# Altium PCB source.PcbDoc
Units mm, origin at the board's own origin, x right, y up, seen from the top; angles counter-clockwise.
Board outline 92.58 x 40.77 mm, 4 copper layers (Top Layer, Layer 1, Layer 2, Bottom Layer), stack 0.603 mm thick; 74 components, 38 nets, 182 pads, 23 vias.
Unrouted connection lines stored in the file: 43.
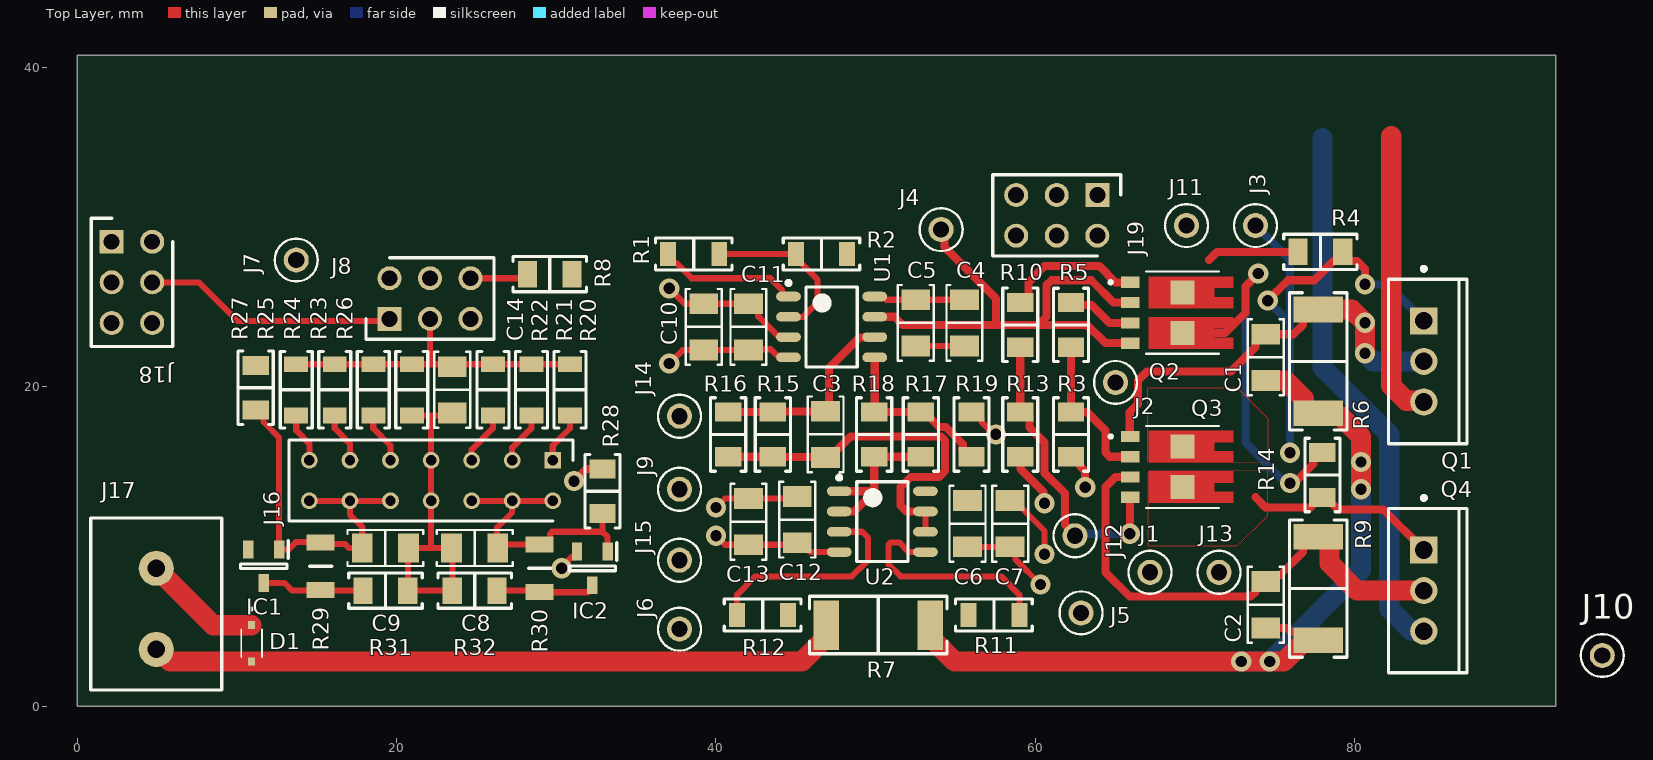
[diagram p0: Top Layer view]
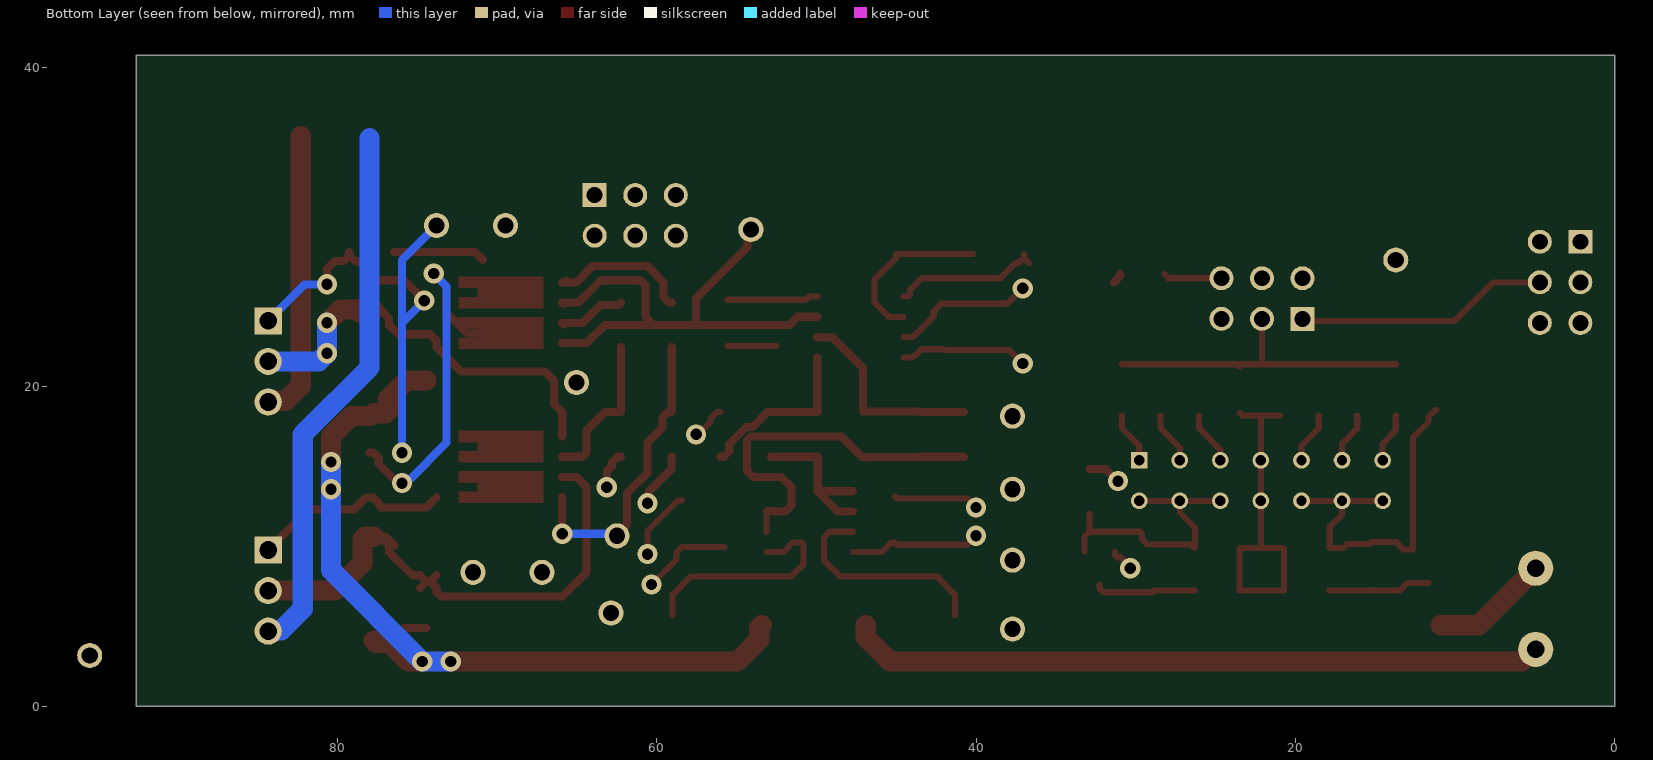
[diagram p1: Bottom Layer view, seen from below]
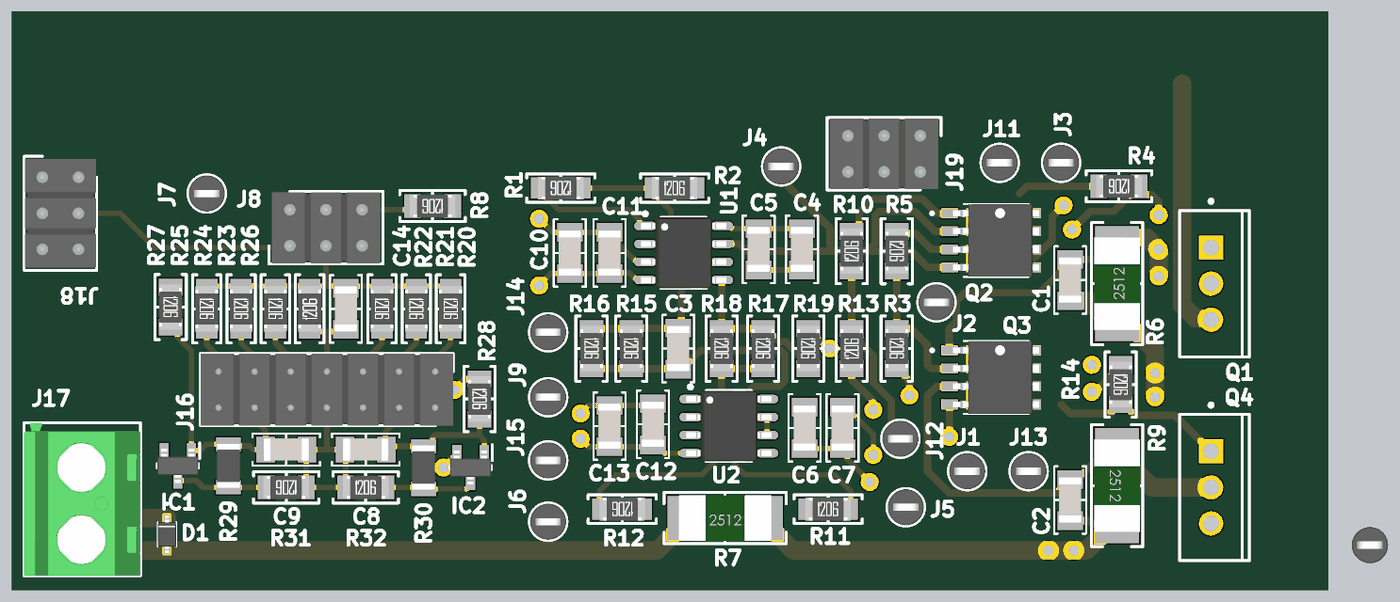
[diagram p2: 3D render of the assembled board from above, using the file's embedded part models]

## Layer stack, top to bottom
Top Solder: solder mask 0.0102, Solder Resist, Dk 3.5
Top Layer: signal copper 0.0356
Dielectric 2: prepreg 0.0711, PP-006, Dk 4.1
Layer 1: signal copper 0.035
Dielectric 1: dielectric 0.32, FR-4, Dk 4.8
Layer 2: signal copper 0.035
Dielectric 3: prepreg 0.0711, PP-006, Dk 4.1
Bottom Layer: signal copper 0.0356
Bottom Solder: solder mask 0.0102, Solder Resist, Dk 3.5

## Board outline
0,0 0,40.767 92.583,40.767 92.583,0

## Design rules (kind name [scope] priority, off if disabled: settings)
BoardOutlineClearance [All] p1: gap=0.3 ignorepadtopadclearanceinfootprint=FALSE except(0.4: Arc-SplitBarrior Arc-SplitContinuation Track-SplitBarrior Track-SplitContinuation SMDPad-SplitBarrior SMDPad-SplitContinuation THPad-SplitBarrior THPad-SplitContinuation Via-SplitBarrior Via-SplitContinuation Fill-SplitBarrior Fill-SplitContinuation Poly-SplitBarrior Poly-SplitContinuation Region-SplitBarrior Region-SplitContinuation Text-SplitBarrior Text-SplitContinuation)
Clearance "Clearance Different Nets" [All] p1: gap=0.2 ignorepadtopadclearanceinfootprint=FALSE except(0.089: Arc-Arc Arc-Track Arc-SMDPad Track-Track Track-SMDPad; 0.127: SMDPad-SMDPad SMDPad-Via THPad-Via Via-Via; 0.254: Arc-Via Arc-Text Track-Via Track-Text SMDPad-Text THPad-Text Via-Text Fill-Text Poly-Text Region-Text Text-Text; 0.5: THPad-THPad Via-Hole)
Clearance "Clearance Same Nets" [All] p2: gap=0.2 ignorepadtopadclearanceinfootprint=FALSE except(0.089: Arc-Arc Arc-Track Arc-SMDPad Track-Track Track-SMDPad SMDPad-SMDPad; 0.127: SMDPad-Via THPad-Via; 0.254: Arc-Via Arc-Text Track-Via Track-Text SMDPad-Text THPad-Text Via-Via Via-Text Fill-Text Poly-Text Region-Text Text-Text)
Clearance "Clearance Bottom Layer" [OnLayer('Bottom Layer')] p3: gap=0.203 ignorepadtopadclearanceinfootprint=TRUE except(0.254: Arc-Text Track-Text SMDPad-Text THPad-Text Via-Text Fill-Text Poly-Text Region-Text Text-Text)
Clearance "Clearance Top Layer" [OnLayer('Top Layer')] p4: gap=0.203 ignorepadtopadclearanceinfootprint=TRUE except(0.254: Arc-Text Track-Text SMDPad-Text THPad-Text Via-Text Fill-Text Poly-Text Region-Text Text-Text)
HoleSize [All] p1: absolutevalues=TRUE maxlimit=6.3 minlimit=0.2 maxpercent=80.000 minpercent=20.000
MinimumAnnularRing [All] p1: minimumring=0.13
MinimumSolderMaskSliver [All] p1: minsoldermaskwidth=0.1
PolygonConnect PolygonConnect_1 [All] p1: thpad.connectstyle=Relief thpad.reliefconductorwidth=0.508 thpad.reliefentries=4 thpad.polygonreliefangle="90 Angle" thpad.airgapwidth=0.254 smdpad.connectstyle=Relief smdpad.reliefconductorwidth=0.508 smdpad.reliefentries=4 smdpad.polygonreliefangle="90 Angle" smdpad.airgapwidth=0.254 via.connectstyle=Direct via.reliefconductorwidth=0.508 via.reliefentries=4 via.polygonreliefangle="90 Angle" via.airgapwidth=0.254
RoutingCorners [All] p1: cornerstyle=Round minsetback=2.54 maxsetback=2.54
RoutingVias [All] p1: holewidth=0.5 width=1 viastyle="Through Hole" minholewidth=0.2 minwidth=0.35 maxholewidth=1 maxwidth=2
SilkToSilkClearance [All] p1: silktosilkclearance=0.1
SilkToSolderMaskClearance [IsPad] p1: minsilkscreentomaskgap=0.1 clearancetoexposedcopper=TRUE
SolderMaskExpansion [All] p1: expansion=0.102 istentingtop=FALSE
Width [All] p1: maxlimit=2.54 minlimit=0.089 preferedwidth=0.381
25 further rules are at their usual default settings.

## Classes and differential pairs
component class misc: C4 C5 C6 C7 C8 C9 C10 C11 C12 C13 C14 D1 IC1 IC2 J16 J17 J19 R20 R21 R22 R23 R24 R25 R26 R27 R28 R29 R30 R31 R32
component class source: C1 C2 C3 J1 J2 J3 J4 J5 J6 J7 J8 J9 J10 J11 J12 J13 J14 J15 J18 Q1 Q2 Q3 Q4 R1 R2 R3 R4 R5 R6 R7 R8 R9 R10 R11 R12 R13 R14 R15 R16 R17 R18 R19 U1 U2

## Components (designator, comment, footprint, x,y, rotation, side; value= is the part's Value field where it differs from the comment)
C1 "0.1 µF" "CAP 1206_3216 - 0.8MM" 74.422,21.844 r90 top
C2 "0.1 µF" "CAP 1206_3216 - 0.8MM" 74.422,6.35 r270 top
C3 "47pF" "CAP 1206_3216 - 1.8MM" 46.863,17.018 r270 top
C4 "0.1 µF" "CAP 1206_3216 - 0.8MM" 55.562,24.003 r90 top
C5 "1 µF" "CAP 1206_3216 - 0.8MM" 52.514,24.003 r90 top
C6 "1 µF" "CAP 1206_3216 - 0.8MM" 55.753,11.43 r270 top
C7 "0.1 µF" "CAP 1206_3216 - 0.8MM" 58.42,11.43 r270 top
C8 "1 µF" "CAP 1206_3216 - 0.8MM" 24.892,9.906 r180 top
C9 "1 µF" "CAP 1206_3216 - 0.8MM" 19.304,9.906 r180 top
C10 "1 µF" "CAP 1206_3216 - 0.8MM" 39.243,23.749 r90 top
C11 "0.1 µF" "CAP 1206_3216 - 0.8MM" 42.037,23.749 r90 top
C12 "1 µF" "CAP 1206_3216 - 0.8MM" 45.085,11.684 r90 top
C13 "0.1 µF" "CAP 1206_3216 - 0.8MM" 42.037,11.557 r90 top
C14 "0.1 µF" "CAP 1206_3216 - 0.8MM" 23.495,19.812 r270 top
D1 "SD15C-01FTG" SD15C01FTG 10.922,3.937 r270 top
IC1 "LM431CCM3" SOT96P240X110-3N 11.684,8.763 r270 top
IC2 "LM431CCM3" SOT96P240X110-3N 32.258,8.636 r270 top
J1 "5001" FP-5001-MFG 67.183,8.382 r0 top
J2 "5001" FP-5001-MFG 65.024,20.273 r0 top
J3 "5001" FP-5001-MFG 73.787,30.099 r0 top
J4 "5001" FP-5001-MFG 54.102,29.845 r0 top
J5 "5001" FP-5001-MFG 62.865,5.842 r0 top
J6 "5001" FP-5001-MFG 37.719,4.826 r0 top
J7 "5001" FP-5001-MFG 13.716,27.94 r0 top
J8 "PRT-12807" HDRV6W82P254_2X3_762X500X884P 19.558,24.257 r0 top
J9 "5001" FP-5001-MFG 37.719,13.589 r0 top
J10 "5001" FP-5001-MFG 95.504,3.175 r0 top
J11 "5001" FP-5001-MFG 69.469,30.099 r0 top
J12 "5001" FP-5001-MFG 62.484,10.668 r0 top
J13 "5001" FP-5001-MFG 71.501,8.382 r0 top
J14 "5001" FP-5001-MFG 37.719,18.161 r0 top
J15 "5001" FP-5001-MFG 37.719,9.144 r0 top
J16 "TD-107-G-AA" HDRV14W46P254_2X7_1778X508X818P 29.781,15.399 r180 top
J17 "282837-2" "TE 282837-2" 4.953,6.096 r90 top
J18 "PRT-12807" HDRV6W82P254_2X3_762X500X884P 2.159,29.083 r270 top
J19 "PRT-12807" HDRV6W82P254_2X3_762X500X884P 63.881,32.004 r180 top
Q1 "TIP32C" ONSC-TO-220-3-221A-09 84.328,21.59 r0 top
Q2 "PHPT610030NPK" TRANS_BUK9K18-40E,115 69.215,24.638 r0 top
Q3 "PHPT610030NPK" TRANS_BUK9K18-40E,115 69.215,14.986 r0 top
Q4 "TIP31C" ONSC-TO-220-3-221A-09 84.328,7.239 r0 top
R1 "10 kOhms" "YAGEO RES 1206_3216" 38.608,28.321 r180 top
R2 "10 kOhms" "YAGEO RES 1206_3216" 46.609,28.321 r0 top
R3 "2.2 kOhms" "RES 1206_3216" 62.23,17.018 r270 top
R4 "51 Ohms" "RES 1206_3216" 77.851,28.448 r180 top
R5 "5.1 Ohms" "RES 1206_3216" 62.23,23.876 r270 top
R6 "330 mOhms" "STACKPOLE CSR2512" 77.724,21.59 r90 top
R7 "500 mOhms" "STACKPOLE CSR2512" 50.165,5.08 r0 top
R8 "12 kOhms" "RES 1206_3216" 29.591,27.051 r180 top
R9 "330 mOhms" "STACKPOLE CSR2512" 77.724,7.366 r270 top
R10 "5.1 Ohms" "RES 1206_3216" 59.055,23.879 r90 top
R11 "3.3 kOhms" "YAGEO RES 1206_3216" 57.404,5.715 r0 top
R12 "3.3 kOhms" "YAGEO RES 1206_3216" 42.926,5.715 r180 top
R13 "2.2 kOhms" "RES 1206_3216" 59.055,17.018 r90 top
R14 "51 Ohms" "RES 1206_3216" 77.978,14.478 r270 top
R15 "2 kOhms" "RES 1206_3216" 43.561,17.018 r270 top
R16 "1 kOhms" "RES 1206_3216" 40.767,17.018 r270 top
R17 "2 kOhms" "RES 1206_3216" 52.832,17.018 r270 top
R18 "1 kOhms" "RES 1206_3216" 49.911,17.018 r270 top
R19 "12 kOhms" "RES 1206_3216" 56.007,17.018 r270 top
R20 "10 kOhms" "YAGEO RES 1206_3216" 30.861,19.812 r270 top
R21 "10 kOhms" "YAGEO RES 1206_3216" 28.448,19.812 r270 top
R22 "10 kOhms" "YAGEO RES 1206_3216" 26.035,19.812 r270 top
R23 "10 kOhms" "YAGEO RES 1206_3216" 18.542,19.812 r270 top
R24 "10 kOhms" "YAGEO RES 1206_3216" 16.129,19.812 r270 top
R25 "10 kOhms" "YAGEO RES 1206_3216" 13.716,19.812 r270 top
R26 "10 kOhms" "YAGEO RES 1206_3216" 20.955,19.812 r90 top
R27 "2.2 kOhms" "RES 1206_3216" 11.176,19.939 r270 top
R28 "2.2 kOhms" "RES 1206_3216" 32.893,13.462 r270 top
R29 "400" RESC3116X65N 15.24,8.763 r90 top
R30 "400" RESC3116X65N 28.956,8.636 r90 top
R31 "2 kOhms" "RES 1206_3216" 19.304,7.239 r180 top
R32 "2 kOhms" "RES 1206_3216" 24.892,7.239 r0 top
U1 "TLV9362" SOIC8-127P600X175-8N 47.244,23.749 r0 top
U2 "TLV9362" SOIC8-127P600X175-8N 50.419,11.557 r0 top

## Footprints (in the part's own frame and the unit in brackets; to place one, negate y for a bottom-side part, rotate by r counter-clockwise, add the part's x,y. Pads: shape width x height; smd on the part's side, far side on the other; paste and mask are expansions set on the pad)
"CAP 1206_3216 - 0.8MM" [mm] "Chip Capacitor, 2-Leads, Body 3.25x1.60mm, IPC Medium Density"
  rect 1.3x1.8 smd: 1(-1.45,0) 2(1.45,0)
  silkscreen extent -2.38,-1.13 2.38,1.13, body extent -1.6,-0.8 1.6,0.8, height 0.8
"CAP 1206_3216 - 1.8MM" [mm] "Chip Capacitor, 2-Leads, Body 3.25x1.60mm, IPC Medium Density"
  rect 1.3x1.8 smd: 1(-1.45,0) 2(1.45,0)
  silkscreen extent -2.38,-1.13 2.38,1.13, body extent -1.6,-0.8 1.6,0.8, height 1.8
FP-5001-MFG [mm]
  round 1.57 hole 1.016 paste-2539.97 mask+0: 1(0,0)
  silkscreen extent -1.35,-1.34 1.35,1.34, body extent -1.45,-1.45 1.45,1.45, height 0.25
HDRV6W82P254_2X3_762X500X884P [mm]
  rect 1.5x1.5 hole 1: 1(0,0)
  round 1.5 hole 1: 2(0,2.54) 3(2.54,0) 4(2.54,2.54) 5(5.08,0) 6(5.08,2.54)
  silkscreen extent -1.47,-1.28 6.55,3.82, body extent -1.27,-1.23 6.35,3.77, height 8.84
HDRV14W46P254_2X7_1778X508X818P [mm]
  rect 1.05x1.05 hole 0.65: 1(0,0)
  round 1.05 hole 0.65: 2(0,2.54) 3(2.54,0) 4(2.54,2.54) 5(5.08,0) 6(5.08,2.54) 7(7.62,0) 8(7.62,2.54) 9(10.16,0) 10(10.16,2.54) 11(12.7,0) 12(12.7,2.54) 13(15.24,0) 14(15.24,2.54)
  silkscreen extent -1.27,-1.27 16.51,3.81, body extent -1.27,-1.27 16.51,3.81, height 8.18
ONSC-TO-220-3-221A-09 [mm] "FM, 3-Leads, Body 10.3x4.85mm, Pitch 2.54mm"
  rect 1.7x1.7 hole 1.1: 1(0,2.54)
  round 1.7 hole 1.1: 2(0,0) 3(0,-2.54)
  silkscreen extent -2.2,-5.15 2.69,5.92, body extent -2.18,-5.15 2.67,5.15, height 19.85
"RES 1206_3216" [mm] "Chip Resistor, 2-Leads, Body 3.13x1.55mm, IPC Medium Density"
  rect 1.2x1.65 smd: 1(-1.4,0) 2(1.4,0)
  silkscreen extent -2.3,-1.1 2.3,1.1, body extent -1.6,-0.8 1.6,0.8, height 0.6
RESC3116X65N [mm]
  rect 1x1.75 smd: 1(-1.5,0) 2(1.5,0)
  silkscreen extent 0,-0.7 0,0.7, body extent -1.55,-0.8 1.55,0.8, height 0.65
SD15C01FTG [mm]
  rect 0.49x0.45 smd: 1(-1.14,0) 2(1.14,0)
  silkscreen extent -2.2,-0.65 0.87,0.65, body extent -1.31,-0.65 1.31,0.65, height 1
SOIC8-127P600X175-8N [mm] "SOIC, 8-Leads, Body 4.91x3.90mm, Pitch 1.27mm, IPC Medium Density"
  oval 1.55x0.6 smd: 1(-2.7,1.905) 2(-2.7,0.635) 3(-2.7,-0.635) 4(-2.7,-1.905) 5(2.7,-1.905) 6(2.7,-0.635) 7(2.7,0.635) 8(2.7,1.905)
  silkscreen extent -2.82,-2.5 1.6,2.88, body extent -3,-2.5 3,2.5, height 1.75
SOT96P240X110-3N [mm]
  rect 1.1x0.65 smd: 1(-1.05,0.96) 2(-1.05,-0.96) 3(1.05,0)
  silkscreen extent -1.6,-1.45 0.15,1.54, body extent -1.2,-1.45 1.2,1.45, height 1.1
"STACKPOLE CSR2512" [mm] "Chip Resistor, 2-Leads, Body 6.40x3.20mm, IPC Medium Density"
  rect 1.6x3.1 smd: 1(-3.25,0) 2(3.25,0)
  silkscreen extent -4.3,-1.8 4.3,1.8, body extent -3.27,-1.6 3.28,1.6, height 0.5
"TE 282837-2" [mm] "Wire to Board Terminal Block Horizontal with Board, 2 Postions, Body 10.76x8.2 mm, Pitch 5.08mm"
  round 2.2 hole 1.1: 1(-2.54,0) 2(2.54,0)
  silkscreen extent -5.08,-4.1 5.68,4.1, body extent -5.08,-4.1 5.68,4.1, height 10.3
TRANS_BUK9K18-40E,115 [mm]
  rect 1.15x0.7 smd paste-0.025: 1(-3.275,1.905) 2(-3.275,0.635) 3(-3.275,-0.635) 4(-3.275,-1.905)
  rect 1.5x1.5 smd paste-2 mask+0: 5_6(0,-1.27) 7_8(0,1.27)
  Top Layer region: 3.175,1.555 2,1.555 2,0.985 3.175,0.985 3.175,0.285 -2.1,0.285 -2.1,2.255 3.175,2.255
  Top Layer region: 3.175,-0.985 2,-0.985 2,-1.555 3.175,-1.555 3.175,-2.255 -2.1,-2.255 -2.1,-0.285 3.175,-0.285
  silkscreen extent -4.6,-2.57 2.29,2.57, body extent -3.03,-2.56 3.03,2.56, height 1.05
"YAGEO RES 1206_3216" [mm] "Chip Resistor, 2-Leads, Body 3.13x1.55mm"
  rect 1x1.5 smd: 1(-1.6,0) 2(1.6,0)
  silkscreen extent -2.4,-1 2.4,1, body extent -1.6,-0.8 1.6,0.8, height 0.6

## Part data
C1 C2 C4 C7 C11 C13 C14: library part 885012208087, "CAP CER 0.1UF 50V X7R 1206", Device Package="1206 (3216 Metric)", manufacturer="Würth Elektronik", Operating Temperature="-55°C ~ 125°C", Supplier Part Number 1=732-8127-1-ND, Temperature Coefficient=X7R, Tolerance=±10%, Voltage - Rated=50V, Applications="General Purpose", Capacitance="0.1 µF", componentlink1description=Datasheet, componentlink1url=https://katalog.we-online.de/pbs/datasheet/885012208087.pdf, componentlink2description="DigiKey Link", componentlink2url=https://www.digikey.com/en/products/detail/würth-elektronik/885012208087/5453982, lastupdated="6/4/2024 19:10:27", Lifecycle Status=Active, Minimum Order=1, Mounting Type="Surface Mount, MLCC", Package / Case="1206 (3216 Metric)", Packaging=TapeAndReel, Part Number=885012208087, Part Status=Active, partid=20879, price=0.06, Series=WCAP-CSGP, Size / Dimension="0.126\" L x 0.063\" W (3.20mm x 1.60mm)", Supplier 1=DigiKey, Thickness (Max)="0.035\" (0.90mm)"
C3: library part 1206AA470KAT1A, "CAP CER 47PF 1KV C0G/NP0 1206", Device Package="1206 (3216 Metric)", manufacturer="AVX Corporation", Operating Temperature="-55°C ~ 125°C", Supplier Part Number 1=478-2949-1-ND, Temperature Coefficient="C0G, NP0", Tolerance=±10%, Voltage - Rated="1000V (1kV)", Applications="General Purpose", Capacitance=47pF, componentlink1description=Datasheet, componentlink1url=http://datasheets.avx.com/AVX-HV_MLCC.pdf, componentlink2description="DigiKey Link", componentlink2url=http://digikey.com/product-detail/en/avx-corporation/1206AA470KAT1A/478-2949-1-ND/808148, Features="High Voltage", lastupdated="9/2/2020 01:05:31", Lifecycle Status=Active, Minimum Order=1, Mounting Type="Surface Mount, MLCC", Package / Case="1206 (3216 Metric)", Packaging=TapeAndReel, Part Number=1206AA470KAT1A, Part Status=Active, partid=21825, price=0.11, Series=-, Size / Dimension="0.130\" L x 0.063\" W (3.30mm x 1.60mm)", Supplier 1=DigiKey, Thickness (Max)="0.071\" (1.80mm)"
C5 C6 C8 C9 C10 C12: library part 885012208093, "CAP CER 1UF 50V X7R 1206", Device Package="1206 (3216 Metric)", manufacturer="Würth Elektronik", Operating Temperature="-55°C ~ 125°C", Supplier Part Number 1=732-7577-1-ND, Temperature Coefficient=X7R, Tolerance=±10%, Voltage - Rated=50V, Applications="General Purpose", Capacitance="1 µF", componentlink1description=Datasheet, componentlink1url=https://katalog.we-online.de/pbs/datasheet/885012208093.pdf, componentlink2description="DigiKey Link", componentlink2url=https://www.digikey.com/en/products/detail/würth-elektronik/885012208093/5453432, lastupdated="6/4/2024 19:10:33", Lifecycle Status=Active, Minimum Order=1, Mounting Type="Surface Mount, MLCC", Package / Case="1206 (3216 Metric)", Packaging=TapeAndReel, Part Number=885012208093, Part Status=Active, partid=39665, price=0.10, Series=WCAP-CSGP, Size / Dimension="0.126\" L x 0.063\" W (3.20mm x 1.60mm)", Supplier 1=DigiKey, Thickness (Max)="0.075\" (1.90mm)"
D1: "TVS Diode (Bi-directional)", Manufacturer_Name=LITTELFUSE, Mouser Part Number=576-SD15C-01FTG, Arrow Part Number=SD15C-01FTG, Arrow Price/Stock=https://www.arrow.com/en/products/sd15c-01ftg/littelfuse?region=nac, Datasheet Link=https://www.arrow.com/en/products/sd15c-01ftg/littelfuse, Height=1.14mm, Manufacturer_Part_Number=SD15C-01FTG, Mouser Price/Stock=https://www.mouser.co.uk/ProductDetail/Littelfuse/SD15C-01FTG?qs=4zl93aaztU8pjSvpxpJP6g%3D%3D
IC1 IC2: library part LM431CCM3_NOPB, "Integrated Circuit", Arrow Part Number=LM431CCM3/NOPB, Manufacturer_Name="Texas Instruments", Mouser Part Number=926-LM431CCM3/NOPB, Arrow Price/Stock=https://www.arrow.com/en/products/lm431ccm3nopb/texas-instruments?utm_currency=USD&region=nac, Datasheet Link=http://www.ti.com/lit/gpn/lm431, Height=1.12mm, Manufacturer_Part_Number=LM431CCM3/NOPB, Mouser Price/Stock=https://www.mouser.co.uk/ProductDetail/Texas-Instruments/LM431CCM3-NOPB?qs=QbsRYf82W3GICygfDXnqiw%3D%3D
J1 J2 J3 J4 J5 J6 J7 J9 J10 J11 J12 J13 J14 J15: library part CMP-2000-05181-2, "PC TEST POINT MINIATURE BLACK", Color=Black, Flammability Rating="UL94 V-0", Package Quantity=100, Body Material=Bronze, Contact Material=Bronze, Contact Plating=Silver, Diameter=2.54mm, Height=0.3inch, Hole Diameter=1.6mm, Housing Color=Black, Inside Diameter=1.27mm, Insulation=Insulated, Insulation Material=Nylon, Lead Free="Lead Free", Length=7.62mm, Material=Nylon, Mount="Through Hole", Number of Contacts=1, Number of Ports=1, Orientation=Straight, Outside Diameter=2.54mm, Packaging=Bulk, Plating=Silver, REACH SVHC="No SVHC", RoHS Compliant=Yes, Series=THM, Termination="Through Hole"
J8 J18 J19: "Connector", Manufacturer_Name=SparkFun, Mouser Part Number=474-PRT-12807, Arrow Part Number=PRT-12807, Arrow Price/Stock=https://www.arrow.com/en/products/prt-12807/sparkfun-electronics, Datasheet Link=https://cdn.sparkfun.com/datasheets/Prototyping/00989.pdf, Height=8.84mm, Manufacturer_Part_Number=PRT-12807, Mouser Price/Stock=https://www.mouser.co.uk/ProductDetail/SparkFun/PRT-12807?qs=WyAARYrbSnYnpz4kKzOm4A%3D%3D
J16: "Connector", Manufacturer_Name=SAMTEC, Mouser Part Number=200-TD107GAA, Arrow Part Number=TD-107-G-AA, Arrow Price/Stock=https://www.arrow.com/en/products/td-107-g-aa/samtec, Datasheet Link=https://suddendocs.samtec.com/catalog_english/td.pdf?_gl=1*1wt4qt0*_ga*MTEzMjQwMzYxOS4xNjk3ODEzMDcx*_ga_3KFNZC07WW*MTcxMjgzNDUyOC40My4xLjE3MTI4MzQ1ODguNjAuMC4w, Height=8.18mm, Manufacturer_Part_Number=TD-107-G-AA, Mouser Price/Stock=https://www.mouser.co.uk/ProductDetail/Samtec/TD-107-G-AA?qs=0lQeLiL1qybxLJvA9lDIZA%3D%3D
J17: "TERM BLK 2P SIDE ENT 5.08MM PCB", Color=Green, Current="13.5 A", manufacturer="TE Connectivity AMP Connectors", Supplier Part Number 1=A113320-ND, Voltage="300 V", componentlink1description=Datasheet, componentlink1url=https://www.te.com/commerce/DocumentDelivery/DDEController?Action=srchrtrv&DocNm=282837&DocType=Customer+Drawing&DocLang=English, componentlink2description="DigiKey Link", componentlink2url=https://www.digikey.com/en/products/detail/te-connectivity-amp-connectors/282837-2/2187973, Features="Interlocking (Side)", lastupdated="6/21/2022 15:00:23", Lifecycle Status=Active, Mating Orientation="Horizontal with Board", Minimum Order=1, Mounting Type="Through Hole", Number of Levels=1, Packaging=Tray, Part Number=282837-2, Part Status=Active, Pitch="0.200\" (5.08mm)", Positions Per Level=2, price=0.31, Series=Buchanan, Supplier 1=DigiKey, Wire Gauge="16-28 AWG", Wire Termination="Screw - Rising Cage Clamp"
Q1: "Complementary Silicon Plastic Power Transistor, 3-Pin TO-220, Tube", manufacturer="On Semiconductor", Supplier Part Number 1=TIP32COS-ND, componentlink1description="Manufacturer URL", componentlink1url=http://www.onsemi.com/, componentlink2description=Datasheet, componentlink2url=http://www.onsemi.com/pub_link/Collateral/TIP31A-D.PDF, ComponentLink3Description="Package Specification", ComponentLink3URL=http://www.onsemi.com/pub_link/Collateral/221A-09.PDF, DatasheetVersion="Rev. 14", fT Min (MHz)=3, IC Continuous (A)=3, Mounting Technology="Through Hole", PackageDescription="3-Pin Flange Mount, Vertical Straight Lead, Body 9.97 x 4.445 mm, Pitch 2.54 mm", PackageReference=TO-220-3-221A-09, PackageVersion="Rev. AG, 09/2011", Packing=Tube, PartNumber=TIP32C, Polarity=PNP, RoHS=FALSE, Supplier 1=Digi-Key
Q4: "Complementary Silicon Plastic Power Transistor, 3-Pin TO-220, Tube", manufacturer="On Semiconductor", Supplier Part Number 1=TIP31COS-ND, componentlink1description="Manufacturer URL", componentlink1url=http://www.onsemi.com/, componentlink2description=Datasheet, componentlink2url=http://www.onsemi.com/pub_link/Collateral/TIP31A-D.PDF, ComponentLink3Description="Package Specification", ComponentLink3URL=http://www.onsemi.com/pub_link/Collateral/221A-09.PDF, DatasheetVersion="Rev. 14", fT Min (MHz)=3, IC Continuous (A)=3, Mounting Technology="Through Hole", PackageDescription="3-Pin Flange Mount, Vertical Straight Lead, Body 9.97 x 4.445 mm, Pitch 2.54 mm", PackageReference=TO-220-3-221A-09, PackageVersion="Rev. AG, 09/2011", Packing=Tube, PartNumber=TIP31C, Polarity=NPN, RoHS=FALSE, Supplier 1=Digi-Key
R1 R2 R20 R21 R22 R23 R24 R25 R26: library part RT1206FRE0710KL, "RES SMD 10K OHM 1% 1/4W 1206", Device Package="1206 (3216 Metric)", manufacturer=Yageo, Operating Temperature="-55°C ~ 155°C", Power (Watts)="0.25W, 1/4W", Supplier Device Package=1206, Supplier Part Number 1=YAG1242CT-ND, Temperature Coefficient=±50ppm/°C, Tolerance=±1%, componentlink1description=Datasheet, componentlink1url=https://www.yageo.com/upload/media/product/productsearch/datasheet/rchip/PYu-RT_1-to-0.01_RoHS_L_11.pdf, componentlink2description="DigiKey Link", componentlink2url=https://www.digikey.com/en/products/detail/yageo/RT1206FRE0710KL/1082868, Composition="Thin Film", Height - Seated (Max)="0.026\" (0.65mm)", lastupdated="7/25/2024 09:21:28", Lifecycle Status=Active, Minimum Order=1, Number of Terminations=2, Package / Case="1206 (3216 Metric)", Packaging=TapeAndReel, Part Number=RT1206FRE0710KL, Part Status=Active, partid=38903, price=0.01, Resistance="10 kOhms", Series=RT, Size / Dimension="0.122\" L x 0.063\" W (3.10mm x 1.60mm)", Supplier 1=DigiKey
R3 R13 R27 R28: library part ERJ-8GEYJ222V, "RES SMD 2.2K OHM 5% 1/4W 1206", Device Package="1206 (3216 Metric)", manufacturer="Panasonic Electronic Components", Operating Temperature="-55°C ~ 155°C", Power (Watts)="0.25W, 1/4W", Ratings=AEC-Q200, Supplier Device Package=1206, Supplier Part Number 1=P2.2KECT-ND, Temperature Coefficient=±200ppm/°C, Tolerance=±5%, componentlink1description=Datasheet, componentlink1url=http://industrial.panasonic.com/www-cgi/jvcr13pz.cgi?E+PZ+3+AOA0001+ERJ8GEYJ222V+7+WW, componentlink2description="DigiKey Link", componentlink2url=https://www.digikey.com/en/products/detail/panasonic-electronic-components/ERJ-8GEYJ222V/10357, Composition="Thick Film", Features="Automotive AEC-Q200", Height - Seated (Max)="0.028\" (0.70mm)", lastupdated="2/9/2024 20:54:10", Lifecycle Status=Active, Minimum Order=1, Number of Terminations=2, Package / Case="1206 (3216 Metric)", Packaging=TapeAndReel, Part Number=ERJ-8GEYJ222V, Part Status=Active, partid=35911, price=0.02, Resistance="2.2 kOhms", Series=ERJ-8G, Size / Dimension="0.126\" L x 0.063\" W (3.20mm x 1.60mm)", Supplier 1=DigiKey
R4 R14: library part ERJ-8GEYJ510V, "RES SMD 51 OHM 5% 1/4W 1206", Device Package="1206 (3216 Metric)", manufacturer="Panasonic Electronic Components", Operating Temperature="-55°C ~ 155°C", Power (Watts)="0.25W, 1/4W", Ratings=AEC-Q200, Supplier Device Package=1206, Supplier Part Number 1=P51ECT-ND, Temperature Coefficient=±200ppm/°C, Tolerance=±5%, componentlink1description=Datasheet, componentlink1url=http://industrial.panasonic.com/www-cgi/jvcr13pz.cgi?E+PZ+3+AOA0001+ERJ8GEYJ510V+7+WW, componentlink2description="DigiKey Link", componentlink2url=https://www.digikey.com/en/products/detail/panasonic-electronic-components/ERJ-8GEYJ510V/11678, Composition="Thick Film", Features="Automotive AEC-Q200", Height - Seated (Max)="0.028\" (0.70mm)", lastupdated="2/9/2024 20:54:16", Lifecycle Status=Active, Minimum Order=1, Number of Terminations=2, Package / Case="1206 (3216 Metric)", Packaging=TapeAndReel, Part Number=ERJ-8GEYJ510V, Part Status=Active, partid=34147, price=0.02, Resistance="51 Ohms", Series=ERJ-8G, Size / Dimension="0.126\" L x 0.063\" W (3.20mm x 1.60mm)", Supplier 1=DigiKey
R5 R10: library part ERJ-8GEYJ5R1V, "RES SMD 5.1 OHM 5% 1/4W 1206", Device Package="1206 (3216 Metric)", manufacturer="Panasonic Electronic Components", Operating Temperature="-55°C ~ 155°C", Power (Watts)="0.25W, 1/4W", Ratings=AEC-Q200, Supplier Device Package=1206, Supplier Part Number 1=P5.1ECT-ND, Temperature Coefficient="-100/ +600ppm/°C", Tolerance=±5%, componentlink1description=Datasheet, componentlink1url=http://industrial.panasonic.com/www-cgi/jvcr13pz.cgi?E+PZ+3+AOA0001+ERJ8GEYJ5R1V+7+WW, componentlink2description="DigiKey Link", componentlink2url=https://www.digikey.com/en/products/detail/panasonic-electronic-components/ERJ-8GEYJ5R1V/282211, Composition="Thick Film", Features="Automotive AEC-Q200", Height - Seated (Max)="0.028\" (0.70mm)", lastupdated="2/9/2024 20:54:09", Lifecycle Status=Active, Minimum Order=1, Number of Terminations=2, Package / Case="1206 (3216 Metric)", Packaging=TapeAndReel, Part Number=ERJ-8GEYJ5R1V, Part Status=Active, partid=36042, price=0.02, Resistance="5.1 Ohms", Series=ERJ-8G, Size / Dimension="0.126\" L x 0.063\" W (3.20mm x 1.60mm)", Supplier 1=DigiKey
R6 R9: library part CSRN2512FKR330, "RES 0.33 OHM 1% 2W 2512", Device Package="2512 (6432 Metric)", manufacturer="Stackpole Electronics Inc", Operating Temperature="-55°C ~ 155°C", Power (Watts)=2W, Supplier Device Package=2512, Supplier Part Number 1=CSRN2512FKR330CT-ND, Temperature Coefficient=±200ppm/°C, Tolerance=±1%, componentlink1description=Datasheet, componentlink1url=https://www.seielect.com/catalog/sei-csr_csrn.pdf, componentlink2description="DigiKey Link", componentlink2url=https://www.digikey.com/en/products/detail/stackpole-electronics-inc/CSRN2512FKR330/1742756, Composition="Thick Film", Features="Current Sense", Height - Seated (Max)="0.028\" (0.70mm)", lastupdated="2/17/2022 18:43:57", Lifecycle Status=Active, Minimum Order=1, Number of Terminations=2, Package / Case="2512 (6432 Metric)", Packaging=TapeAndReel, Part Number=CSRN2512FKR330, Part Status=Active, partid=1770, price=0.12, Resistance="330 mOhms", Series=CSRN, Size / Dimension="0.250\" L x 0.124\" W (6.35mm x 3.15mm)", Supplier 1=DigiKey
R7: library part CSRN2512FKR500, "RES 0.5 OHM 1% 2W 2512", Device Package="2512 (6432 Metric)", manufacturer="Stackpole Electronics Inc", Operating Temperature="-55°C ~ 155°C", Power (Watts)=2W, Supplier Device Package=2512, Supplier Part Number 1=CSRN2512FKR500CT-ND, Temperature Coefficient=±200ppm/°C, Tolerance=±1%, componentlink1description=Datasheet, componentlink1url=https://www.seielect.com/catalog/sei-csr_csrn.pdf, componentlink2description="DigiKey Link", componentlink2url=https://www.digikey.com/en/products/detail/stackpole-electronics-inc/CSRN2512FKR500/1742768, Composition="Thick Film", Features="Current Sense", Height - Seated (Max)="0.028\" (0.70mm)", lastupdated="2/17/2022 18:43:58", Lifecycle Status=Active, Minimum Order=1, Number of Terminations=2, Package / Case="2512 (6432 Metric)", Packaging=TapeAndReel, Part Number=CSRN2512FKR500, Part Status=Active, partid=1683, price=0.07, Resistance="500 mOhms", Series=CSRN, Size / Dimension="0.250\" L x 0.124\" W (6.35mm x 3.15mm)", Supplier 1=DigiKey
R8 R19: library part ERA-8AEB123V, "RES SMD 12K OHM 0.1% 1/4W 1206", Device Package="1206 (3216 Metric)", manufacturer="Panasonic Electronic Components", Operating Temperature="-55°C ~ 155°C", Power (Watts)="0.25W, 1/4W", Ratings=AEC-Q200, Supplier Device Package=1206, Supplier Part Number 1=10-ERA-8AEB123VCT-ND, Temperature Coefficient=±25ppm/°C, Tolerance=±0.1%, componentlink1description=Datasheet, componentlink1url=https://industrial.panasonic.com/cdbs/www-data/pdf/RDM0000/AOA0000C307.pdf, componentlink2description="DigiKey Link", componentlink2url=https://www.digikey.com/en/products/detail/panasonic-electronic-components/ERA-8AEB123V/3070775, Composition="Thin Film", Features="Automotive AEC-Q200", Height - Seated (Max)="0.028\" (0.70mm)", lastupdated="2/9/2024 20:53:53", Lifecycle Status=Active, Minimum Order=1, Number of Terminations=2, Package / Case="1206 (3216 Metric)", Packaging=TapeAndReel, Part Number=ERA-8AEB123V, Part Status=Active, partid=40988, price=0.10, Resistance="12 kOhms", Series=ERA-8A, Size / Dimension="0.126\" L x 0.063\" W (3.20mm x 1.60mm)", Supplier 1=DigiKey
R11 R12: library part RT1206FRE073K3L, "RES SMD 3.3K OHM 1% 1/4W 1206", Device Package="1206 (3216 Metric)", manufacturer=Yageo, Operating Temperature="-55°C ~ 155°C", Power (Watts)="0.25W, 1/4W", Supplier Device Package=1206, Supplier Part Number 1=13-RT1206FRE073K3LCT-ND, Temperature Coefficient=±50ppm/°C, Tolerance=±1%, componentlink1description=Datasheet, componentlink1url=https://www.yageo.com/upload/media/product/productsearch/datasheet/rchip/PYu-RT_1-to-0.01_RoHS_L_12.pdf, componentlink2description="DigiKey Link", componentlink2url=https://www.digikey.com/en/products/detail/yageo/RT1206FRE073K3L/1083187, Composition="Thin Film", Height - Seated (Max)="0.026\" (0.65mm)", lastupdated="7/25/2024 09:21:22", Lifecycle Status=Active, Minimum Order=1, Number of Terminations=2, Package / Case="1206 (3216 Metric)", Packaging=TapeAndReel, Part Number=RT1206FRE073K3L, Part Status=Active, partid=58380, price=0.01, Resistance="3.3 kOhms", Series=RT, Size / Dimension="0.122\" L x 0.063\" W (3.10mm x 1.60mm)", Supplier 1=DigiKey
R15 R17 R31 R32: library part ERA-8AEB202V, "RES SMD 2K OHM 0.1% 1/4W 1206", Device Package="1206 (3216 Metric)", manufacturer="Panasonic Electronic Components", Operating Temperature="-55°C ~ 155°C", Power (Watts)="0.25W, 1/4W", Ratings=AEC-Q200, Supplier Device Package=1206, Supplier Part Number 1=P2.0KBCCT-ND, Temperature Coefficient=±25ppm/°C, Tolerance=±0.1%, componentlink1description=Datasheet, componentlink1url=https://industrial.panasonic.com/cdbs/www-data/pdf/RDM0000/AOA0000C307.pdf, componentlink2description="DigiKey Link", componentlink2url=https://www.digikey.com/en/products/detail/panasonic-electronic-components/ERA-8AEB202V/3070866, Composition="Thin Film", Features="Automotive AEC-Q200", Height - Seated (Max)="0.028\" (0.70mm)", lastupdated="2/9/2024 20:54:17", Lifecycle Status=Active, Minimum Order=1, Number of Terminations=2, Package / Case="1206 (3216 Metric)", Packaging=TapeAndReel, Part Number=ERA-8AEB202V, Part Status=Active, partid=34011, price=0.10, Resistance="2 kOhms", Series=ERA-8A, Size / Dimension="0.126\" L x 0.063\" W (3.20mm x 1.60mm)", Supplier 1=DigiKey
R16 R18: library part ERA-8AEB102V, "RES SMD 1K OHM 0.1% 1/4W 1206", Device Package="1206 (3216 Metric)", manufacturer="Panasonic Electronic Components", Operating Temperature="-55°C ~ 155°C", Power (Watts)="0.25W, 1/4W", Ratings=AEC-Q200, Supplier Device Package=1206, Supplier Part Number 1=P1.0KBCCT-ND, Temperature Coefficient=±25ppm/°C, Tolerance=±0.1%, componentlink1description=Datasheet, componentlink1url=https://industrial.panasonic.com/cdbs/www-data/pdf/RDM0000/AOA0000C307.pdf, componentlink2description="DigiKey Link", componentlink2url=https://www.digikey.com/en/products/detail/panasonic-electronic-components/ERA-8AEB102V/3070741, Composition="Thin Film", Features="Automotive AEC-Q200", Height - Seated (Max)="0.028\" (0.70mm)", lastupdated="2/9/2024 20:54:17", Lifecycle Status=Active, Minimum Order=1, Number of Terminations=2, Package / Case="1206 (3216 Metric)", Packaging=TapeAndReel, Part Number=ERA-8AEB102V, Part Status=Active, partid=33986, price=0.10, Resistance="1 kOhms", Series=ERA-8A, Size / Dimension="0.126\" L x 0.063\" W (3.20mm x 1.60mm)", Supplier 1=DigiKey
R29 R30: library part RT1206BRD07400RL, "Resistor", Manufacturer_Name=YAGEO, Mouser Part Number=603-RT1206BRD07400RL, Arrow Part Number=RT1206BRD07400RL, Arrow Price/Stock=null?region=nac, Datasheet Link=https://www.mouser.fr/datasheet/2/447/PYu_RT_1_to_0_01_RoHS_L_15-3461507.pdf, Height=0.65mm, Manufacturer_Part_Number=RT1206BRD07400RL, Mouser Price/Stock=https://www.mouser.co.uk/ProductDetail/YAGEO/RT1206BRD07400RL?qs=NgbZBzc1CyGp8d%2FABgImbQ%3D%3D
U1 U2: "TLV936x 10-MHz, 40-V, RRO, Operational Amplifie", componentlink1description=Datasheet, componentlink1url=https://www.ti.com/lit/ds/symlink/tlv9362.pdf
Q2 Q3: componentlink1description=Datasheet, componentlink1url=https://assets.nexperia.com/documents/data-sheet/PHPT610030NPK.pdf, componentlink2description=Supplier, componentlink2url=https://hr.mouser.com/ProductDetail/Nexperia/PHPT610030NPKX?qs=%252BRKXB2WKlSeoXKhT5DAScw%3D%3D

## Via types
v1: diameter 1.27, hole 0.711, Top Layer to Bottom Layer, 23 vias

## Nets (pads, with @x,y where several pads share a name; then routed paths per layer and width w, separated by ;. In a path a pad name is that pad's centre, name@x,y a point inside that pad or via, vN(x,y) a via of type N, cw(c..) or ccw(c..) an arc to the next point about the centre after c; other vN are vias at no path point)
GND: C4.1 C5.1 C6.2 C7.2 C8.2 C9.1 C10.2 C11.2 C12.2 C13.2 C14.2 D1.1 IC1.2 IC2.2 J1.1 J9.1 J10.1 J11.1 J16.7 J16.8 J17.2 R19.1 R26.1 R31.1 R32.1 U1.3 | length 56.2
  Top Layer w0.381: R26.1 22.288,18.212 ; C14.2 23.345,18.212 22.288,18.212 ; v1(30.353,8.636) 30.353,8.741 30.938,9.326 31.163,9.326 31.298,9.461 IC2.2 ; v1(37.084,26.162) 38.047,25.199 C10.2 C11.2 42.189,25.199 42.649,24.739 42.649,24.407 43.833,23.223 43.9,23.223 44.01,23.114 U1.3 ; v1(40.005,12.446) 40.566,13.007 C13.2 44.958,13.007 C12.2 ; C5.1 C4.1 ; C6.2 C7.2 58.757,9.643 58.757,9.188 v1(60.325,7.62) ; R19.1 56.232,18.418 56.641,18.008 56.641,17.783 57.407,17.018 v1(57.531,17.018) ; 22.098,9.906 C8.2 23.492,9.856 R32.1 R31.1 20.704,9.856 C9.1 22.098,9.906 ; 22.098,9.906 22.161,9.969 J16.8 J16.7 22.161,18.085 22.288,18.212
  Top Layer w1.27: J17.2 8.512,5.077 D1.1
NetC1_1: C1.1 C2.2 J5.1 R6.1 R7.2 R9.2 R11.1 | length 57
  Top Layer w0.381: J5.1@62.853,5.83 J5.1
  Top Layer w0.508: C2.2 75.773,4.9 76.021,4.652 76.428,4.652 76.722,4.358 R9.2@76.722,3.951
  Top Layer w1.27: R7.2 53.58,4.915 53.58,4.165 54.948,2.797 72.895,2.797 v1(72.898,2.794) v1(74.676,2.794) 75.565,2.794 76.722,3.951 77.559,3.951 R9.2 ; C1.1 75.67,20.394 76.809,19.255 76.809,18.505 76.974,18.34 R6.1 77.889,18.175 79.107,18.175 80.391,16.891 v1(80.391,15.292) v1(80.391,13.589)
  Bottom Layer w1.27: v1(72.898,2.794) v1(74.676,2.794) 80.391,8.509 v1(80.391,13.589) v1(80.391,15.292)
NetC1_2: C1.2 Q1.2 Q3.1 R6.2 | length 28.6
  Top Layer w0.508: Q3.1 65.913,16.918 65.913,18.415 66.421,18.923 66.421,20.393 66.983,20.955 72.263,20.955 73.793,22.485 73.793,22.898 74.189,23.294 C1.2 76.178,23.294 76.756,23.872 76.756,24.294 77.302,24.84 R6.2
  Top Layer w1.27: R6.2 R6.2@78.474,24.84 ; R6.2@78.639,24.675 R6.2@78.474,24.84 ; v1(80.645,22.098) v1(80.645,24.003) 79.808,24.84 R6.2@78.474,24.84 ; Q1.2@84.328,21.509 Q1.2
  Bottom Layer w1.27: v1(80.645,24.003) v1(80.645,22.098) 81.153,21.59 Q1.2
NetC2_1: C2.1 Q3.3 Q4.2 R9.1 | length 34.2
  Top Layer w0.508: Q3.3 65.024,14.351 64.389,13.716 64.389,8.382 65.913,6.858 73.48,6.858 73.776,7.154 73.776,7.404 C2.1@74.172,7.8 ; C2.1@73.776,8.196 C2.1@74.172,7.8 ; C2.1@74.808,7.414 C2.1 ; R9.1@76.428,10.07 76.974,10.616 R9.1@77.302,10.616 ; R9.1 R9.1@77.302,10.616 ; C2.1@74.172,7.8 C2.1 ; C2.1 74.818,8.196 75.304,8.196 76.756,9.648 76.756,10.07 R9.1@77.302,10.616
  Top Layer w1.27: R9.1 78.257,10.616 78.422,10.451 78.422,8.954 80.137,7.239 Q4.2
NetC3_1: C3.1 R8.1 R15.1 R16.1 U1.6 | length 14.1
  Top Layer w0.508: R16.1 R15.1 43.586,18.443 47.088,18.443 47.088,21.18 48.992,23.084 49.374,23.084 49.386,23.096 49.926,23.096 U1.6 ; R8.1@30.991,26.924 31.372,26.543 R8.1@30.991,26.924 ; R8.1@30.991,26.924 R8.1 R8.1@30.991,26.924
NetC3_2: C3.2 J14.1 R15.2 R16.2 U2.6 U2.7 | length 23.5
  Top Layer w0.381: R16.2@40.764,15.621 R16.2 ; U2.6 U2.7
  Top Layer w0.508: R16.2 R15.2 43.586,15.593 C3.2@46.838,15.593 ; C3.2 C3.2@46.838,15.593 ; U2.7@52.614,12.192 51.943,12.192 51.562,12.573 51.562,13.716 52.197,14.351 53.975,14.351 54.356,14.732 54.356,16.637 54.102,16.891 48.436,16.891 47.138,15.593 C3.2@46.838,15.593 ; U2.7@52.614,12.222 53.089,12.222 U2.7
NetC14_1: C14.1 J8.3 R20.1 R21.1 R22.1 R23.1 R24.1 R25.1 R26.2 | length 20.1
  Top Layer w0.381: R25.1 R24.1 R23.1 R26.2 22.098,21.412 ; J8.3 22.098,21.412 ; C14.1 23.645,21.412 R22.1 R21.1 R20.1 ; C14.1@23.495,21.412 22.098,21.412
NetD1_2: D1.2 J6.1 J17.1 R7.1 R12.1 | length 43.7
  Top Layer w1.27: J17.1 5.057,3.556 5.816,2.797 D1.2 45.382,2.797 46.75,4.165 46.915,4.33 R7.1
NetIC1_3: IC1.3 R29.1 R31.2 | length 6.4
  Top Layer w0.381: IC1.3 12.988,7.713 13.462,7.239 15.216,7.239 R29.1 15.264,7.239 R31.2
NetIC2_3: IC2.3 R30.1 R32.2 | length 6.3
  Top Layer w0.381: R32.2 28.853,7.239 R30.1 31.98,7.136 32.07,7.226 32.123,7.226 32.258,7.361 IC2.3
NetJ2_1: J2.1 Q3.2 R3.1 R5.2 | length 9.9
  Top Layer w0.508: R5.2 R3.1 63.243,18.418 64.389,17.272 64.389,15.875 64.643,15.621 Q3.2 ; J2.1 J2.1@65.024,20.434
NetJ3_1: J3.1 Q1.1 Q3.7_8 R4.1 | length 31.7
  Top Layer w0.508: J3.1 J3.1@73.99,29.896 ; v1(74.549,25.4) 75.819,26.67 77.473,26.67 78.68,27.877 78.905,27.877 R4.1@79.251,28.223 ; R4.1 R4.1@79.251,28.223 ; v1(80.645,26.416) 80.645,27.368 80.136,27.877 79.597,27.877 R4.1@79.251,28.223 ; Q1.1@83.732,24.726 Q1.1
  Bottom Layer w0.508: J3.1 75.946,27.94 75.946,24.003 ; v1(74.549,25.4) 75.946,24.003 ; v1(75.946,15.875) 75.946,24.003 ; v1(80.645,26.416) 82.042,26.416 Q1.1
NetJ4_1: J4.1 Q2.2 Q2.4 U1.7 | length 32.8
  Top Layer w0.508: U1.7 51.181,24.384 51.689,23.876 57.531,23.876 ; J4.1 54.305,29.642 54.305,28.745 57.531,25.519 57.531,23.876 ; Q2.2@65.844,25.177 Q2.2 64.897,25.273 63.5,26.67 61.004,26.67 60.706,26.372 60.706,24.384 60.198,23.876 ; Q2.4 64.389,22.733 63.246,23.876 60.198,23.876 ; 57.531,23.876 60.198,23.876
NetJ7_1: J7.1 J8.2 J8.4 J8.6 R8.2 | length 3.7
  Top Layer w0.381: J8.6 27.937,26.797 R8.2
NetJ8_1: J8.1 J18.4 | length 16
  Top Layer w0.381: J18.4 7.62,26.543 10.033,24.13 18.936,24.13 19.187,24.381 19.434,24.381 J8.1
NetJ12_1: J12.1 Q3.4 R10.1 R13.2 | length 19.4
  Top Layer w0.508: R10.1 R13.2 59.28,18.418 59.626,18.072 59.626,17.463 60.579,16.51 60.579,14.605 61.849,13.335 61.849,11.374 62.484,10.739 J12.1 J12.1@62.357,10.795 ; v1(65.913,10.795) 65.94,10.822 Q3.4 Q3.4@65.913,13.054
  Bottom Layer w0.508: J12.1 62.611,10.795 v1(65.913,10.795)
NetJ13_1: J13.1 Q3.5_6 Q4.1 R14.2 | length 12.5
  Top Layer w0.508: 73.787,13.081 74.422,12.446 77.232,12.446 77.407,12.621 77.407,12.732 77.753,13.078 R14.2 78.203,13.078 78.962,12.319 81.788,12.319 Q4.1
NetJ15_1: J15.1 R17.2 R18.2 U2.1 U2.2 | length 10
  Top Layer w0.508: U2.2 48.662,12.192 49.911,13.441 ; U2.1 49.89,13.462 49.911,13.441 ; R17.2 R18.2 49.911,13.441
NetJ16_1: J16.1 R20.2 | length 3.3
  Top Layer w0.381: J16.1 29.782,16.32 30.861,17.399 R20.2
NetJ16_3: J16.3 R21.2 | length 3.3
  Top Layer w0.381: J16.3 27.242,16.193 28.448,17.399 R21.2
NetJ16_5: J16.5 R22.2 | length 3.4
  Top Layer w0.381: J16.5 24.702,16.066 26.035,17.399 R22.2
NetJ16_9: J16.9 R23.2 | length 3.3
  Top Layer w0.381: R23.2 18.542,17.399 19.621,16.32 J16.9
NetJ16_11: J16.11 R24.2 | length 3.2
  Top Layer w0.381: R24.2 16.129,17.399 17.081,16.447 J16.11
NetJ16_13: J16.13 R25.2 | length 3.2
  Top Layer w0.381: R25.2 13.716,17.271 14.541,16.446 J16.13
NetJ18_2: J18.2 R2.2
NetQ2_1: Q2.1 R10.2 | length 8.9
  Top Layer w0.508: R10.2 59.217,25.279 59.563,25.625 59.563,26.543 60.579,27.559 64.008,27.559 65.024,26.543 Q2.1@65.715,26.543 ; Q2.1@65.619,26.639 Q2.1@65.715,26.543 ; Q2.1 Q2.1@65.715,26.543
NetQ2_3: Q2.3 R5.1 | length 4.4
  Top Layer w0.508: R5.1 62.379,25.127 63.519,25.127 64.643,24.003 Q2.3 Q2.3@65.844,23.907
NetR1_1: R1.1 R2.1 U1.2 | length 10.6
  Top Layer w0.381: R1.1 R2.1 45.009,28.071 46.355,26.725 46.355,25.273 45.466,24.384 U1.2
NetR11_2: R11.2 U2.5 | length 14.1
  Top Layer w0.381: U2.5 52.07,9.652 51.469,10.253 50.938,10.253 50.8,10.116 50.8,8.89 51.562,8.128 57.861,8.128 59.004,6.985 R11.2
NetR12_2: R12.2 U2.3 | length 13.7
  Top Layer w0.381: R12.2 41.326,6.985 42.469,8.128 48.514,8.128 49.53,9.144 49.53,10.541 49.149,10.922 U2.3
NetR17_1: R17.1 R18.1 R19.2 U1.5 | length 11
  Top Layer w0.508: U1.5 49.944,18.451 R18.1 53.057,18.418 53.981,17.494 54.388,17.494 55.456,16.426 55.456,15.964 55.802,15.618 R19.2
signal_A_bypass_inv: J8.5 R1.2 U1.1 | length 9.4
  Top Layer w0.381: R1.2@36.698,27.761 R1.2@37.008,28.071 ; R1.2 R1.2@37.008,28.071 ; U1.1 44.233,25.654 44.132,25.755 44.132,26.066 43.401,26.797 38.481,26.797 37.517,27.761 37.318,27.761 R1.2@37.008,28.071
VCC: J19.1 Q1.3 Q2.7_8 R3.2 R4.2 R28.1 | length 28.4
  Top Layer w0.508: v1(31.115,14.097) 31.88,14.862 R28.1 ; R3.2 62.455,15.618 62.801,15.272 62.801,15.047 63.119,14.729 v1(63.119,13.716) ; 70.866,27.94 71.374,28.448 R4.2
  Top Layer w1.27: 82.296,35.687 82.296,20.066 83.23,19.132 84.246,19.132 Q1.3
VCC_LDO_OUT: C4.2 C5.2 C6.1 C7.1 J19.2 U1.8 U2.8 | length 10.1
  Top Layer w0.381: U1.8 50.465,25.654 50.666,25.453 C5.2 C4.2 ; C7.1 58.67,12.88 60.579,10.971 v1(60.579,9.525)
VDD: J19.5 Q2.5_6 Q4.3 R13.1 R14.1 R27.1 | length 62.5
  Top Layer w0.508: R13.1 59.064,15.609 59.064,14.85 60.503,13.411 60.503,12.776 v1(60.579,12.7) ; Q2.5_6 71.882,23.368 73.152,24.638 73.152,26.289 v1(73.96,27.097) ; v1(75.946,13.97) 76.092,14.116 76.346,14.116 77.407,15.177 77.407,15.532 77.753,15.878 R14.1
  Bottom Layer w0.508: v1(73.96,27.097) 73.152,26.289 73.152,16.51 75.426,14.236 75.474,14.236 75.74,13.97 v1(75.946,13.97)
  Bottom Layer w1.27: 77.978,35.56 77.978,21.209 82.169,17.018 82.169,6.096 83.514,4.751 84.276,4.751 Q4.3
VDD_LDO_OUT: C10.1 C11.1 C12.1 C13.1 J19.6 U1.4 U2.4 | length 16.3
  Top Layer w0.381: v1(37.084,21.463) 37.92,22.299 C10.1 C11.1 42.09,22.352 43.434,22.352 43.833,21.953 43.9,21.953 44.01,21.844 U1.4 ; v1(40.005,10.668) 40.566,10.107 C13.1 44.958,10.107 C12.1 45.335,10.234 45.917,9.652 U2.4
Vref+: C8.1 IC2.1 J16.2 J16.4 J16.6 R28.2 R30.2 | length 18.1
  Top Layer w0.381: J16.6 J16.4 ; J16.2 J16.4 ; R28.2 32.893,10.922 ; IC2.1 33.218,10.597 32.893,10.922 ; J16.4 27.241,12.128 26.289,11.176 26.289,9.959 C8.1 26.572,10.136 R30.2 29.288,10.136 29.598,10.446 29.598,10.778 29.742,10.922 32.893,10.922
Vref-: C9.2 IC1.1 J16.10 J16.12 J16.14 R27.2 R29.2 | length 23.3
  Top Layer w0.381: R27.2 11.257,18.539 11.667,18.129 11.667,17.797 12.644,16.82 IC1.1 13.242,9.813 13.716,10.287 15.216,10.287 R29.2 15.343,10.16 16.764,10.16 17.018,9.906 C9.2 17.854,11.229 17.081,12.002 J16.12 ; J16.14 J16.12 ; J16.10 J16.12
pads on no net: J18.1 J18.3 J18.5 J18.6 J19.3 J19.4

## Polygon pours and split planes (outlines as drawn)
NetJ3_1 on Top Layer "NETJ3_1_L01_P001" (solid, pour order 1): 67.115,15.271 67.056,15.33 67.056,19.939 72.644,19.939 74.549,18.034 74.549,15.24
NetJ13_1 on Top Layer "NETJ13_1_L01_P000" (solid, pour order 0): 67.115,14.701 67.056,14.642 67.056,10.033 72.644,10.033 74.549,11.938 74.549,14.732